# EAGLE board NoUSB_BatteryBalancer (EAGLE 9.2.0)
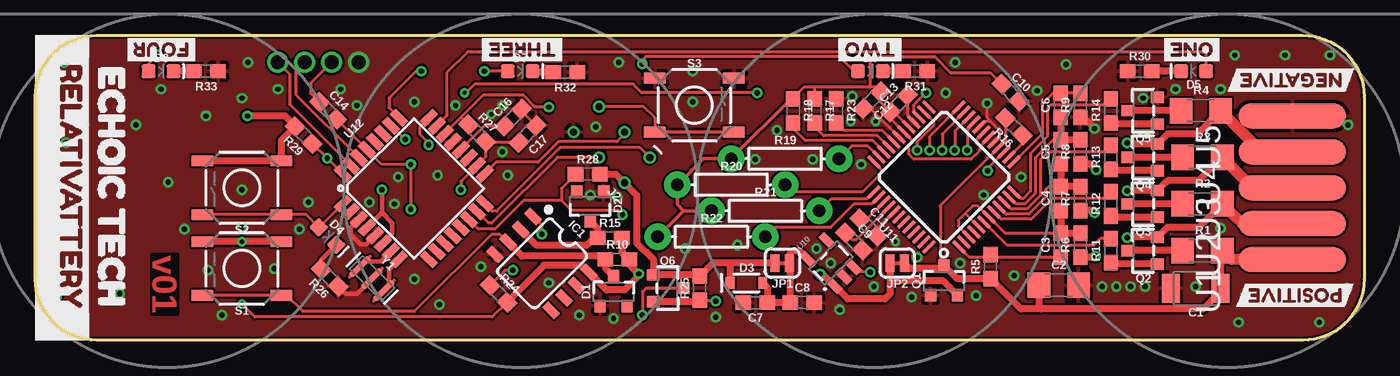
[diagram p0: board, top side]
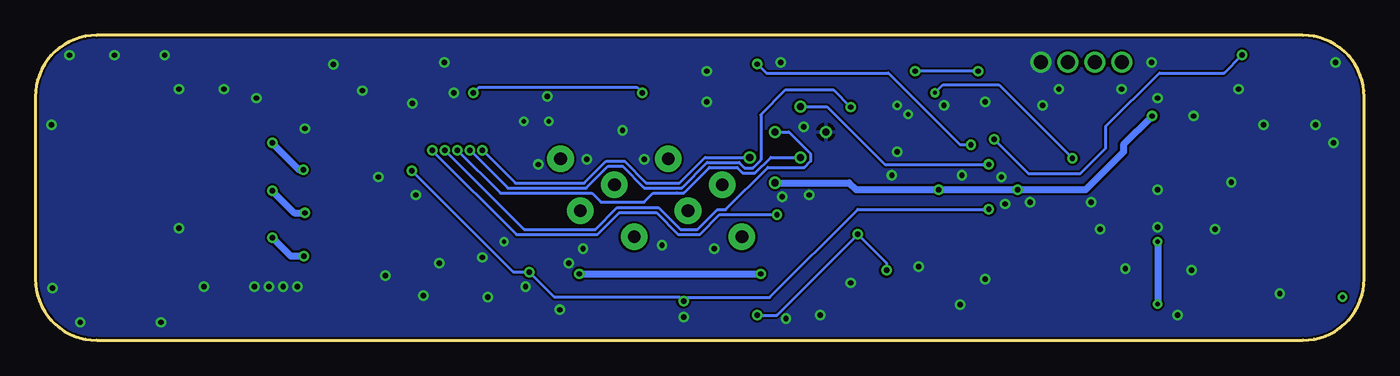
[diagram p1: board, bottom side, seen from below]

Size 93.98 x 21.59 mm. Coordinates in mm from the lower left corner, seen from the top.
Outline: 4.34,21.59 89.64,21.59 arc-90 93.98,17.25 93.98,4.34 arc-90 89.64,0 4.34,0 arc-90 0,4.34 0,17.25 arc-90 4.34,21.59
Copper layers (1*16): Top 0.035mm / dielectric 1.5mm / Bottom 0.035mm
Design rules "SparkFun-2-layer-PCBWay-LIMIT": minimum track width 6mil, minimum drill 0.3mm, track to track 6mil, track to pad 6mil, pad to pad 6mil, via to via 6mil, smd to smd 6mil, copper to edge 6mil, drill to drill 6mil, minimum pad ring 7mil, minimum via ring 7mil, stop-mask expansion 4mil, vias tented up to drill 25mil, thermal gap 10mil

## Footprints (pad centres in the part's own frame; a part is rotated, then mirrored left to right if it is on the bottom)
1210 = smd 1.27 x 2.06: 1 -1.755,0; 2 1.755,0
1206 = smd 1.6 x 1.8: 1 -1.4,0; 2 1.4,0
0603 = smd 1.1 x 1: 1 -0.85,0; 2 0.85,0
SOT23-3 = smd 0.8 x 0.9: 1 -0.95,-1; 2 0.95,-1; 3 0,1.1
SOD-323 = smd 0.63 x 0.83: A 1.15,0; C -1.15,0
LED-0603 = smd 1 x 1: A -0.877,0; C 0.877,0
SO08 = smd 0.6 x 1.2: 1 -1.905,-2.8; 2 -0.635,-2.8; 3 0.635,-2.8; 4 1.905,-2.8; 5 1.905,2.8; 6 0.635,2.8; 7 -0.635,2.8; 8 -1.905,2.8
2X3_TEST_POINTS = drill 0.508: 1 -2.54,-1.27; 2 -2.54,1.27; 3 0,-1.27; 4 0,1.27; 5 2.54,-1.27; 6 2.54,1.27
SMT-JUMPER_2_NC_TRACE_SILK = smd 0.635 x 1.27: 1 -0.508,0; 2 0.508,0
AXIAL-0.3 = drill 0.9 pad 1.88: P$1 -3.81,0; P$2 3.81,0
TACTILE_SWITCH_SMD_5.2MM = smd 1.524 x 0.762: 1 -2.794,1.905; 2 2.794,1.905; 3 -2.794,-1.905; 4 2.794,-1.905
1X01_SMD_0.1IN = smd 1.778 x 7.62: 1 0,0
SOT23-5 = smd 0.55 x 1.2: 1 -0.95,-1.3; 2 0,-1.3; 3 0.95,-1.3; 4 0.95,1.3; 5 -0.95,1.3
LQFP-48 = smd 0.254 x 1.143: 1 -2.75,-4.25; 2 -2.25,-4.25; 3 -1.75,-4.25; 4 -1.25,-4.25; 5 -0.75,-4.25; 6 -0.25,-4.25; 7 0.25,-4.25; 8 0.75,-4.25; 9 1.25,-4.25; 10 1.75,-4.25; 11 2.25,-4.25; 12 2.75,-4.25; 25 2.75,4.25; 26 2.25,4.25; 27 1.75,4.25; 28 1.25,4.25; 29 0.75,4.25; 30 0.25,4.25; 31 -0.25,4.25; 32 -0.75,4.25; 33 -1.25,4.25; 34 -1.75,4.25; 35 -2.25,4.25; 36 -2.75,4.25 | smd 1.143 x 0.254: 13 4.25,-2.75; 14 4.25,-2.25; 15 4.25,-1.75; 16 4.25,-1.25; 17 4.25,-0.75; 18 4.25,-0.25; 19 4.25,0.25; 20 4.25,0.75; 21 4.25,1.25; 22 4.25,1.75; 23 4.25,2.25; 24 4.25,2.75; 37 -4.25,2.75; 38 -4.25,2.25; 39 -4.25,1.75; 40 -4.25,1.25; 41 -4.25,0.75; 42 -4.25,0.25; 43 -4.25,-0.25; 44 -4.25,-0.75; 45 -4.25,-1.25; 46 -4.25,-1.75; 47 -4.25,-2.25; 48 -4.25,-2.75
TQFP32-08 = smd 1.27 x 0.559: 1 -4.293,2.8; 2 -4.293,2; 3 -4.293,1.2; 4 -4.293,0.4; 5 -4.293,-0.4; 6 -4.293,-1.2; 7 -4.293,-2; 8 -4.293,-2.8; 17 4.293,-2.8; 18 4.293,-2; 19 4.293,-1.2; 20 4.293,-0.4; 21 4.293,0.4; 22 4.293,1.2; 23 4.293,2; 24 4.293,2.8 | smd 0.559 x 1.27: 9 -2.8,-4.293; 10 -2,-4.293; 11 -1.2,-4.293; 12 -0.4,-4.293; 13 0.4,-4.293; 14 1.2,-4.293; 15 2,-4.293; 16 2.8,-4.293; 25 2.8,4.293; 26 2,4.293; 27 1.2,4.293; 28 0.4,4.293; 29 -0.4,4.293; 30 -1.2,4.293; 31 -2,4.293; 32 -2.8,4.293
RESONATOR-SMD-3.2X1.3 = smd 0.45 x 1.905: 1 -1.2,0; 2 0,0; 3 1.2,0

## Placement (x,y rotation side)
C1  10uF  [1210]  82.06,3.68 180 top
C2  1.0uF  [1206]  72.38,3.9 0 top
C3  0.1uF  [0603]  72.52,6.73 90 top
C4  0.1uF  [0603]  72.52,10.03 90 top
C5  0.1uF  [0603]  72.52,13.34 90 top
C6  0.1uF  [0603]  72.52,16.64 90 top
C7  1.0uF  [0603]  50.93,2.67 180 top
C8  0.1uF  [0603]  54.23,2.67 0 top
C9  1.0uF  [0603]  57.91,6.99 315 top
C10  0.1uF  [0603]  68.96,17.53 315 top
C11  1.0uF  [0603]  58.93,8 315 top
C12  0.1uF  [0603]  59.18,17.02 225 top
C13  1.0uF  [0603]  61.09,16.76 45 top
C14  0.1uF  [0603]  20.7,16.26 315 top
C16  0.1uF  [0603]  33.78,15.75 45 top
C17  0.1uF  [0603]  34.8,14.61 225 top
D1  MATCH  [SOT23-3]  40.89,3.43 0 top
D2  TH  [SOT23-3]  39.24,9.53 180 top
D3  3A/10V/280mV  [SOD-323]  50.29,4.06 0 top
D4  BLUE  [LED-0603]  20.66,7.38 315 top
D5  BLUE  [LED-0603]  81.92,19.05 180 top
D6  BLUE  [LED-0603]  59.05,19.05 0 top
D7  BLUE  [LED-0603]  34.29,19.05 0 top
D8  BLUE  [LED-0603]  8.89,19.05 0 top
FRAME1  FRAME-LEDGER  [CREATIVE_COMMONS]  -70.48,-42.34 0 top  (outside the outline)
IC1  OP-AMP  [SO08]  35.85,5.43 225 top
J2  ISP  [2X3_TEST_POINTS]  40.77,13.84 135 top
JP1  VCC  [SMT-JUMPER_2_NC_TRACE_SILK]  52.83,5.46 180 top
JP2  RPP_BYP  [SMT-JUMPER_2_NC_TRACE_SILK]  60.96,5.46 180 top
Q1  [SOT23-3]  64.26,4.19 0 top
Q2  [SOT23-3]  78.36,6.35 90 top
Q3  [SOT23-3]  78.36,9.65 90 top
Q4  [SOT23-3]  78.36,12.95 90 top
Q5  [SOT23-3]  78.36,16.26 90 top
Q6  [SOT23-3]  44.7,3.68 270 top
R1  10  [1206]  82.55,6.35 0 top
R2  10  [1206]  82.55,9.65 0 top
R3  10  [1206]  82.55,12.95 0 top
R4  10  [1206]  82.42,16.26 0 top
R5  10k  [0603]  67.56,5.21 90 top
R6  10k  [0603]  73.91,6.73 90 top
R7  10k  [0603]  73.91,10.03 90 top
R8  10k  [0603]  73.91,13.34 90 top
R9  10k  [0603]  73.91,16.64 90 top
R10  1M  [0603]  41.15,5.71 0 top
R11  10k  [0603]  76.07,6.35 90 top
R12  10k  [0603]  76.07,9.65 90 top
R13  10k  [0603]  76.07,12.95 90 top
R14  10k  [0603]  76.07,16.26 90 top
R15  330k  [0603]  40.64,7.24 0 top
R16  10k  [0603]  69.22,15.11 135 top
R17  10k  [0603]  55.12,16.26 270 top
R18  10k  [0603]  53.59,16.26 270 top
R19  DNP  [AXIAL-0.3]  53.03,12.85 0 top
R20  DNP  [AXIAL-0.3]  49.22,11.01 0 top
R21  DNP  [AXIAL-0.3]  51.63,9.17 0 top
R22  DNP  [AXIAL-0.3]  47.82,7.33 0 top
R23  10k  [0603]  56.64,16.26 270 top
R24  10k  [0603]  32.77,3.3 315 top
R25  10k  [0603]  46.99,3.68 90 top
R26  10k  [0603]  20.8,4.43 135 top
R27  10k  [0603]  31.24,14.67 315 top
R28  10k  [0603]  39.05,11.75 0 top
R29  10k  [0603]  18.98,14.54 135 top
R30  1k  [0603]  78.11,19.05 0 top
R31  1k  [0603]  62.23,19.05 180 top
R32  1k  [0603]  37.47,18.97 180 top
R33  1k  [0603]  12.07,19.05 180 top
S1  Force Charge  [TACTILE_SWITCH_SMD_5.2MM]  14.61,5.08 180 top
S2  TEST  [TACTILE_SWITCH_SMD_5.2MM]  14.61,10.79 180 top
S3  Tall Switch  [TACTILE_SWITCH_SMD_5.2MM]  46.61,16.64 0 top
U1  TAP_POINT  [1X01_SMD_0.1IN]  88.9,5.71 90 top
U2  TAP_POINT  [1X01_SMD_0.1IN]  88.9,8.26 90 top
U3  TAP_POINT  [1X01_SMD_0.1IN]  88.9,10.79 90 top
U4  TAP_POINT  [1X01_SMD_0.1IN]  88.9,13.34 90 top
U5  TAP_POINT  [1X01_SMD_0.1IN]  88.9,15.88 90 top
U10  MCP1755  [SOT23-5]  56.26,5.46 45 top
U11  AD7280A  [LQFP-48]  64.26,11.56 45 top
U12  ATMEGA328P_TQFP  [TQFP32-08]  26.77,10.74 45 top
U$1  [POSITIVE1]  93.34,3.17 180 top
U$2  [NEGATIVE0]  93.34,18.41 180 top
U$3  [TWO2]  61.72,20.57 180 top
U$4  [THREE3]  37.72,20.57 180 top
U$5  [FOUR4]  11.81,20.57 180 top
U$6  [RELATIVATTERY5]  2.54,20.95 270 top
U$7  [ONE1]  84.2,20.57 180 top
U$9  [ECHOIC_TECH4]  5.4,20.95 270 top
Y1  16MHz  [RESONATOR-SMD-3.2X1.3]  23.81,4.37 315 top

## Library data of the parts
C1 = SparkFun-Capacitors; PROD_ID: CAP-09824
C2 = SparkFun-Capacitors; PROD_ID: CAP-09822
C3-C6 C8 C10 C12 = SparkFun-Capacitors; PROD_ID: CAP-08604
C7 C9 C11 C13 = SparkFun-Capacitors; PROD_ID: CAP-13930
C14 C16 C17 = SparkFun-Capacitors; PROD_ID: CAP-00810
D1 D2 = SparkFun-DiscreteSemi; PROD_ID: DIO-14123
D3 = SparkFun-DiscreteSemi; PROD_ID: DIO-14072
D4-D8 = SparkFun-LED; PROD_ID: DIO-08575
FRAME1 = SparkFun-Aesthetics
IC1 = SparkFun-IC-Amplifiers; PROD_ID: NA-XXXXX
J2 = SparkFun-Connectors
JP1 JP2 = SparkFun-Jumpers
Q1 = SparkFun-DiscreteSemi; PROD_ID: TRANS-11153
Q2-Q6 = MTAES_V2_UniqueParts
R1-R4 = SparkFun-Resistors; PROD_ID: RES-08705
R5-R9 R11-R14 R16-R18 R23-R29 = SparkFun-Resistors; PROD_ID: RES-00824
R10 = SparkFun-Resistors; PROD_ID: RES-07868
R15 = SparkFun-Resistors; PROD_ID: RES-08968
R19-R22 U1-U5 U10 U11 = BBLib
R30-R33 = SparkFun-Resistors; PROD_ID: RES-07856
S1-S3 = SparkFun-Switches; PROD_ID: SWCH-14139
U12 = SparkFun-IC-Microcontroller; PROD_ID: IC-09069
U$1 U$2 = buzzard_labels_0
U$3-U$7 U$9 = buzzard_labels_echoic
Y1 = SparkFun-Clocks; PROD_ID: XTAL-08900

## Nets
5V: C7.1 C8.1 D3.A JP1.1 U10.5
!CS: R28.1 U11.21 U12.14
!CVNST: R27.1 U11.24 U12.22
!DTR: C14.1
ALERT: R29.1 U11.27 U12.32
AREF: C16.1 U12.20
CHARGE: IC1.1 Q6.3 R24.1
GND: C1.2 C2.2 C7.2 C8.2 C9.2 C10.2 C11.2 C12.2 C13.2 C16.2 C17.1 D1.1 D2.1 IC1.4 J2.6 Q1.1 Q5.2 R9.1 R23.1 R26.1 R30.1 R31.1 R32.1 R33.1 S3.1 S3.2 U5.1 U10.2 U11.17 U11.20 U11.28 U11.31 U11.41 U12.3 U12.5 U12.21 Y1.2
LED1: D5.A U12.23
LED2: D6.A U12.24
LED3: D7.A U12.25
LED4: D8.A U12.26
MISO: J2.1 U11.26 U12.16
MOSI: J2.4 U11.23 U12.15
N$3: U12.7 Y1.1
N$4: U12.8 Y1.3
N$5: Q2.3 R1.1
N$6: Q2.2 R2.2 R6.1 U2.1
N$7: Q3.3 R2.1
N$8: Q3.2 R3.2 R7.1 U3.1
N$9: Q4.3 R3.1
N$10: Q4.2 R4.2 R8.1 U4.1
N$11: Q5.3 R4.1
N$12: Q2.1 R11.1
N$13: Q3.1 R12.1
N$14: R16.1 U11.14
N$15: Q4.1 R13.1
N$16: Q5.1 R14.1
N$17: C6.2 R9.2 U11.13
N$18: R14.2 U11.12
N$19: C5.2 C6.1 R8.2 U11.11
N$20: R13.2 U11.10
N$21: C4.2 C5.1 R7.2 U11.9
N$22: R12.2 U11.8
N$23: R22.P$2 U11.38
N$24: R11.2 U11.6
N$25: C3.1 R5.2 U11.1
N$26: C3.2 C4.1 R6.2 U11.3 U11.5 U11.7
N$27: C9.1 U11.40
N$28: R17.2 U11.33
N$29: C11.1 U11.39
N$30: R23.2 U11.32
N$31: R18.2 U11.34
N$32: R21.P$2 U11.37
N$33: R20.P$2 U11.36
N$34: R19.P$2 U11.35
N$37: D4.C R26.2
N$39: D8.C R33.2
N$40: D1.3 IC1.3 R10.1 S1.1 S1.2
N$41: D2.3 IC1.2 R15.1
N$42: D7.C R32.2
N$43: D6.C R31.2
N$44: D5.C R30.2
RESET: C14.2 J2.5 Q6.2 R25.1 S3.3 S3.4 U10.3 U11.15 U12.29
RX-I: U12.30
SCLK: J2.3 U11.22 U12.17
TEST: D4.A S2.1 S2.2 U12.1
TX-O: U12.31
V_BATT: IC1.8 JP2.2 Q1.2 R10.2 R15.2 R24.2 S1.3 S1.4 U10.1
V_RAW: C1.1 C2.1 JP2.1 Q1.3 R1.2 R5.1 R16.2 U1.1 U11.16
VCC: C17.2 D3.C J2.2 JP1.2 Q6.1 R25.2 R27.2 R28.2 R29.2 S2.3 S2.4 U12.4 U12.6 U12.18
VREG: C10.1 C12.1 C13.1 R17.1 R18.1 R19.P$1 R20.P$1 R21.P$1 R22.P$1 U11.18 U11.19 U11.29 U11.30

## Tracks (layer width: path | path; a pad name or v marks a point on that pad's centre or on a via)
5V
  Top 0.508: U10.5 54.07,6.31 53.56,6.31 53.34,6.1 JP1.1 53.38,5.42 C8.1 C7.1 51.78,3.73 D3.A
!CS  (via drill 0.38)
  Top 0.203: U11.21 65.91,14.98 v65.91,13.45 | U12.14 31.34,7.87 32.51,7.87 34.54,9.91 37.21,9.91 | R28.1 37.21,10.76 37.21,9.91 | v41.53,8.89 41.21,9.21 37.91,9.21 37.21,9.91
  Bottom 0.203: v65.91,13.45 59.96,7.49 54.23,7.49 52.68,9.04 50.06,9.04 48.51,7.49 46.99,7.49 45.59,8.89 v41.53,8.89
!CVNST  (via drill 0.38)
  Top 0.203: U11.24 63.25,14.43 v63.25,13.46 | 30.09,15.76 U12.22 | R27.1 30.15,15.76 30.09,15.76 | v36.32,16.51 35.36,16.51 34.52,17.34 31.68,17.34 30.09,15.76
  Bottom 0.203: v63.25,13.46 60.55,10.77 55.02,10.77 53.47,12.32 52.45,12.32 50.93,10.79 48.26,10.79 46.47,12.59 44.2,12.59 43.82,12.2 43.23,12.2 42.67,12.76 42.67,15.97 40.92,17.73 37.54,17.73 v36.32,16.51
!DTR  (via drill 1)
  Top 0.203: C14.1 19.46,17.49 19.46,18.2 v20.95,19.68
ALERT  (via drill 0.3, 0.38)
  Top 0.203: U11.27 62.1,16.19 62.1,16.63 v62.99,17.53 | R29.1 v20.64,12.89 21.73,11.8 U12.32 | v30.35,17.53 30.47,17.53 31.08,18.14 42.28,18.14 42.89,17.53 v51.05,17.53
  Bottom 0.203: v62.99,17.53 62.61,17.91 51.44,17.91 v51.05,17.53 | v20.64,12.89 25.84,18.1 29.78,18.1 v30.35,17.53
AREF
  Top 0.203: U12.20 31.74,15.15 C16.1
CHARGE  (via drill 0.38)
  Top 0.203: R24.1 33.22,4.95 v33.78,4.95 | v42.93,1.78 42.93,3.43 43.18,3.68 Q6.3 | IC1.1 35.81,8.16 v35.81,7.51
  Bottom 0.203: v42.93,1.78 41.54,1.78 v35.81,7.51 33.78,5.48 v33.78,4.95
GND  (via drill 0.3, 0.38, 1)
  Top 0.203: U11.20 67.14,15.49 67.56,15.49 | U11.17 68.2,14.43 68.2,14.86 67.56,15.49 | U11.41 59.53,7.88 C11.2 | U11.28 61.69,15.9 C13.2 | C12.2 59.05,16.42 U11.31 | 67.56,15.49 67.31,15.75 v67.31,16.76 | C17.1 34.38,16.22 C16.2
  Top 0.305: U12.3 22.28,7.95 22.28,7.51 23,6.79 23.39,6.79 U12.5 | Y1.2 22.74,3.3 21.93,3.3 R26.1 | U12.5
  Top 0.508: R9.1 74.21,15.49 74.42,15.49 v74.93,14.99
  other vias: 78.36,17.14 64.39,17.53 69.72,11.56 56.26,5.46 55.25,6.48 15.03,19.68 41.28,19.68 65.07,19.68 84.83,20.18 52.45,14.86 58.42,12.45 75.44,3.81 76.45,3.81 77.47,3.81 78.49,3.81 82.05,3.81 5.97,3.3 2.16,13.97 3.43,15.24 14.61,17.14 9.4,11.18 39.24,10.29 41.15,10.16 10.54,7.87 14.61,8 18.67,7.87 31.5,5.21 57.66,15.49 59.44,15.49 60.83,6.99 32.26,16 33.02,16.64 12.19,4.95 16.89,5.08 14.61,10.67 12.07,15.88 7.11,15.24 22.73,16.64 29.72,16.64 26.8,16.89 28.45,11.68 25.65,11.56 19.3,9.78 25.4,9.65 23.62,9.78 13.21,1.78 28.57,2.54 36.32,4.06 45.97,6.48 49.66,6.73 50.93,12.83 54.99,12.83 40.89,1.52 38.48,1.78 48.13,1.65 56.9,2.16 61.98,3.05 66.55,3.17 65.41,5.46 67.06,10.29 80.64,17.78 83.82,17.78 92.84,15.24 2.03,19.68 70.86,17.67 69.22,4.57 88.38,20.18 91.56,20.18 92.77,3.69 85.09,1.27 90.81,1.27 83.83,7.94 57.79,17.27 59.31,3.81 62.36,5.87 26.8,4.32 33.4,11.68 39.62,15.11 33.02,13.34 46.48,16.89 46.48,19.05 8.89,17.78 17.14,17.78 72.9,19.54 22.86,19.68 21.59,17.78
  pour Top (isolate 0.152, rank 2): 0,0 0,21.59 93.98,21.59 93.98,0
  pour Bottom (isolate 0.152, rank 2): 93.98,0 0,0 0,21.59 93.98,21.59
LED1
  Top 0.203: D5.A 82.79,20.44 30.59,20.44 29.1,18.94 29.1,15.9 U12.23
LED2  (via drill 0.38)
  Top 0.203: D6.A 57.91,19.05 56.88,20.08 43.18,20.08 42.92,19.82 v42.92,19.55 | U12.24 27.18,15.11 27.18,14.61 27.81,13.97 v27.81,13.84
  Bottom 0.203: v27.81,13.84 28.57,13.84 33.65,18.92 42.28,18.92 v42.92,19.55
LED3  (via drill 0.38)
  Top 0.203: U12.25 25.02,16.45 25.02,17.14 26.92,19.05 v27.3,19.05 | D7.A v31.75,19.05
  Bottom 0.203: v27.3,19.05 v31.75,19.05
LED4  (via drill 0.38)
  Top 0.203: v26.16,14.22 25.19,15.19 U12.26 | D8.A 8.01,19.57 v8.64,20.19
  Bottom 0.203: v26.16,14.22 23.75,11.81 20.07,11.81 18.29,13.59 18.29,15.11 14.48,18.92 9.91,18.92 v8.64,20.19
MISO  (via drill 0.38)
  Top 0.203: U11.26 63.5,15.5 63.5,15.19 62.36,14.04 v62.36,13.46 | J2.1 42.78,13.63 37.08,13.63 37.08,13.61 32.62,9.14 32.33,9.14 U12.16
  Bottom 0.203: v62.36,13.46 60.02,11.12 55.16,11.12 53.61,12.68 52.3,12.68 50.78,11.15 48.41,11.15 46.61,12.95 J2.1
MOSI  (via drill 0.38)
  Top 0.203: v64.14,13.46 64.14,14.61 U11.23 | J2.4 36.93,12.95 32.28,8.3 32.05,8.3 U12.15
  Bottom 0.203: v64.14,13.46 61.09,10.41 54.61,10.41 53.98,9.78 50.93,9.78 50.29,10.41 48.64,10.41 48.62,10.44 48.11,10.44 46.32,12.23 44.35,12.23 43.96,11.85 43.07,11.85 41.97,12.95 J2.4
N$3
  Top 0.203: Y1.1
  Top 0.305: Y1.1 23.32,5.57 24.43,5.57 U12.7
N$4
  Top 0.203: Y1.3
  Top 0.305: Y1.3 25.02,3.88 25.02,5.03 U12.8
N$5
  Top 0.508: R1.1 Q2.3
N$6  (via drill 0.38)
  Top 0.508: R2.2 82.3,8 80.08,8 79.98,7.9 79.95,7.9 Q2.2 77.25,7.3 v77.22,7.27 | v74.98,5.97 74.89,5.88 R6.1
  Top 0.762: R2.2 84.9,8.7 85.35,8.26 U2.1
  Bottom 0.508: v77.22,7.27 75.91,5.97 v74.98,5.97
N$7
  Top 0.508: R2.1 Q3.3
N$8  (via drill 0.38)
  Top 0.508: R3.2 82.3,11.3 80.08,11.3 79.98,11.2 79.95,11.2 Q3.2 77.25,10.6 v77.22,10.57 | R7.1 74.76,9.18 v74.93,9.02
  Top 0.762: R3.2 86.11,10.79 U3.1
  Bottom 0.508: v77.22,10.57 75.66,9.02 v74.93,9.02
N$9
  Top 0.508: R3.1 Q4.3
N$10  (via drill 0.38)
  Top 0.508: R4.2 82.17,14.61 80.08,14.61 79.98,14.5 79.95,14.5 Q4.2 77.28,13.9 v77.22,13.97 | R8.1 74.61,12.49 v75.03,12.07
  Top 0.762: R4.2 86.74,13.34 U4.1
  Bottom 0.508: v77.22,13.97 75.31,12.07 v75.03,12.07
N$11
  Top 0.508: R4.1 Q5.3
N$12
  Top 0.508: Q2.1 76.17,5.4 R11.1
N$13
  Top 0.508: Q3.1 76.17,8.7 R12.1
N$14
  Top 0.203: R16.1 69.82,13.93 U11.14
N$15
  Top 0.508: Q4.1 76.17,12 R13.1
N$16
  Top 0.508: Q5.1 76.17,15.31 R14.1
N$17
  Top 0.203: U11.13 71.22,14.63 71.22,16.74 71.97,17.49 C6.2 R9.2
N$18
  Top 0.203: R14.2 75.6,16.64 71.78,16.64 71.58,16.43 71.58,14.42 70.38,13.23 70.38,10.55 69.87,10.03 69.67,10.03 U11.12
N$19
  Top 0.203: C5.2 71.97,14.19 70.74,12.95 70.74,10.4 69.99,9.65 69.35,9.65 U11.11
  Top 0.508: C6.1 C5.2 R8.2
N$20
  Top 0.203: R13.2 75.6,13.34 71.63,13.34 71.09,12.8 71.09,10.26 70.13,9.3 69,9.3 U11.10
N$21
  Top 0.203: U11.9 68.65,8.94 70.28,8.94 71.45,10.11 71.45,10.67 71.67,10.88 C4.2
  Top 0.508: C5.1 C4.2 R7.2
N$22
  Top 0.203: R12.2 75.6,10.03 71.88,10.03 70.43,8.59 68.29,8.59 U11.8
N$23
  Top 0.203: U11.38 59.18,9.65 57.91,9.65 56.23,7.97 52.28,7.97 R22.P$2
N$24
  Top 0.203: R11.2 75.31,7.2 74.84,6.73 68.73,6.73 U11.6
N$25
  Top 0.203: C3.1 67.56,5.88 | 67.56,5.88 66.05,5.88 U11.1 | R5.2 67.56,5.88
N$26
  Top 0.203: C3.2 68.59,7.58 U11.7 66.65,9.53 66.29,9.53 65.79,9.02 | U11.3 65.28,8.07 65.28,8.51 65.79,9.02 | U11.5 65.79,8.97 65.79,9.02
  Top 0.508: C4.1 C3.2 R6.2
N$27
  Top 0.203: C9.1 57.79,7.11 58.04,7.11 60.36,9.44 U11.40
N$28
  Top 0.203: U11.33 59.57,14.48 55.75,14.48 55.12,15.11 R17.2
N$29
  Top 0.203: C11.1 58.83,8.6 U11.39
N$30
  Top 0.203: U11.32 59.9,14.86 57.19,14.86 R23.2
N$31
  Top 0.203: U11.34 59.22,14.12 54.46,14.12 53.59,14.99 R18.2
N$32
  Top 0.203: U11.37 58.82,10.01 56.28,10.01 R21.P$2
N$33
  Top 0.203: U11.36 59.82,12.11 59.82,11.81 58.51,10.5 53.53,10.5 R20.P$2
N$34
  Top 0.203: R19.P$2 57.75,13.77 58.87,13.77 U11.35
N$37
  Top 0.305: D4.C 20.2,5.68 R26.2
N$39
  Top 0.508: R33.2 D8.C
N$40
  Top 0.203: IC1.3 32.89,7.49 32.26,7.49 26.8,2.03 18.92,2.03 17.78,3.17 S1.1 S1.2
  Top 0.508: D1.3 40.3,5.12 R10.1 40.04,5.97 34.41,5.97 IC1.3
N$41
  Top 0.508: R15.1 39.75,7.24 | IC1.2 35.44,6.73 38.99,6.73 39.5,7.24 39.75,7.24 | D2.3 39.75,7.92 39.75,7.24
N$42
  Top 0.508: R32.2 35.24,18.97 D7.C
N$43
  Top 0.508: R31.2 D6.C
N$44
  Top 0.508: D5.C R30.2
RESET  (via drill 0.38)
  Top 0.203: U11.15 67.36,12.18 v67.36,12.01 | U10.3 58.24,4.83 v59.05,4.83 | v48.13,2.78 47.04,2.78 R25.1 | J2.5 43.03,16.54 43.81,15.75 S3.3 | 23.49,13.46 24.5,12.45 v26.54,12.45 v26.54,9.27 | 23.49,13.46 U12.29 | C14.2 23.49,13.47 23.49,13.46
  Top 0.254: S3.4 S3.3
  Top 0.508: R25.1 46.89,2.73 Q6.2
  Bottom 0.203: v67.36,12.01 60.18,4.83 v59.05,4.83 57.29,3.06 48.41,3.06 v48.13,2.78 47.88,3.04 42.05,3.04 35.81,9.27 v26.54,9.27 | v26.54,12.45 33.91,12.45 38,16.54 J2.5
RX-I  (via drill 1)
  Top 0.203: v19.05,19.68 18.41,19.05 18.41,17.4 U12.30
SCLK  (via drill 0.38)
  Top 0.203: U11.22 65.02,14.79 v65.02,13.46 | U12.17 32.6,12.61 35.56,12.61 37.01,14.06 41.15,14.06 41.67,14.57 J2.3
  Bottom 0.203: v65.02,13.46 59.41,7.85 54.38,7.85 52.83,9.4 49.92,9.4 48.37,7.85 47.14,7.85 45.74,9.25 45.17,9.25 42.17,12.24 39.59,12.24 39.16,12.68 39.16,13.2 40.7,14.74 J2.3
SHLD  (via drill 0.3)
  other vias: 1.52,3.05
TEST
  Top 0.203: U12.1 20.07,8 | D4.A 19.15,8.89 S2.1 S2.2
  Top 0.305: 20.07,8 D4.A
TX-O  (via drill 1)
  Top 0.203: U12.31 17.98,16.71 17.98,18.85 v17.14,19.68
V_BATT  (via drill 0.3, 0.38)
  Top 0.203: v14.61,2.56 15.52,1.65 32.32,1.65 R24.2
  Top 0.406: R15.2 41.49,6.14 41.91,5.71 R10.2
  Top 0.508: Q1.2 64.21,4.19 60.45,4.19 | JP2.2 60.45,4.19 | v55.5,4.7 55.68,4.7 U10.1 57.46,2.92 60.07,2.92 60.45,3.3 60.45,4.19 | R15.2 41.49,6.22 R10.2 42,5.37 v42.67,4.7 42.67,4.57 41.66,3.56 40.41,3.56 IC1.8 38.66,5.31 35.98,5.31 R24.2 | S1.3 v14.61,6.99 S1.4
  Bottom 0.508: v55.5,4.7 v42.67,4.7 | v14.61,6.99 v14.61,2.56
V_RAW
  Top 0.203: Q1.3 64.01,5.54 64.01,9.54 U11.16 68.61,14.14 R16.2
  Top 0.508: R1.2 83.82,6.22 C1.1 83.82,3.42 82.6,2.21 71.12,2.21 | 71.12,2.21 69.71,2.21 R5.1 65.2,4.36 Q1.3 64.05,5.08 61.85,5.08 JP2.1 | C2.1 70.98,2.35 71.12,2.21
  Top 0.762: R1.2 84.59,5.71 U1.1
VCC  (via drill 0.38)
  Top 0.203: 17.4,12.83 S2.3 | v30.1,10.67 30.1,11.24 U12.18 31.84,12.99 R27.2 31.9,14 C17.2
  Top 0.305: U12.6 25.25,7.52 25.25,8.31 24.51,9.05 | 24.51,9.05 U12.4 | v24.51,10.67 24.51,9.05
  Top 0.508: JP1.2 49.02,5.46 | D3.C 49.14,5.34 49.02,5.46 | 49.02,5.46 47.92,5.46 R25.2 46.89,4.63 Q6.1 43.7,5.73 42.54,6.9 42.54,10.28 J2.2 41.07,11.75 R28.2 | 17.4,12.83 17.4,14.14 17.54,14.28 17.54,14.3 R29.2 17.65,15.88 v14.99,15.88 | S2.3 S2.4
  Bottom 0.508: v14.99,15.88 17.02,13.84 17.02,13.34 19.68,10.67 v24.51,10.67 v30.1,10.67 35.94,10.67 36.42,11.15 J2.2
VREG
  Top 0.203: 60.58,16.16 60.72,16.16 U11.29 | 60.58,16.16 60.58,15.59 U11.30 61.98,14.2 61.98,13.96 61.73,13.72 61.73,13.2 62.11,12.83 66.17,12.83 66.79,13.45 66.79,13.73 | 60.58,16.16 C13.1 59.78,16.87 C12.1 59.5,17.91 59.05,17.91 | R18.1 53.59,17.14 54.36,17.91 55.12,17.91 | 55.12,17.91 R17.1 | U11.18 66.79,13.73 | 66.79,13.73 66.55,13.97 66.55,14.2 U11.19 | C10.1 67.56,18.92 64.77,18.92 63.61,20.08 59.45,20.08 59.05,19.68 59.05,17.91 | 55.12,17.91 56.03,17.91 56.04,17.91 57.25,17.91 59.05,17.91
  Top 0.254: 45.85,9.17 R22.P$1 | R21.P$1 45.85,9.17 | 45.85,9.17 45.41,9.61 R20.P$1 47.25,12.85 R19.P$1 53.47,17.11 R18.1

## Text on the board
Top: v01
tDocu: Owen Lyke